# EAGLE board porta_stella (EAGLE 9.1.3)
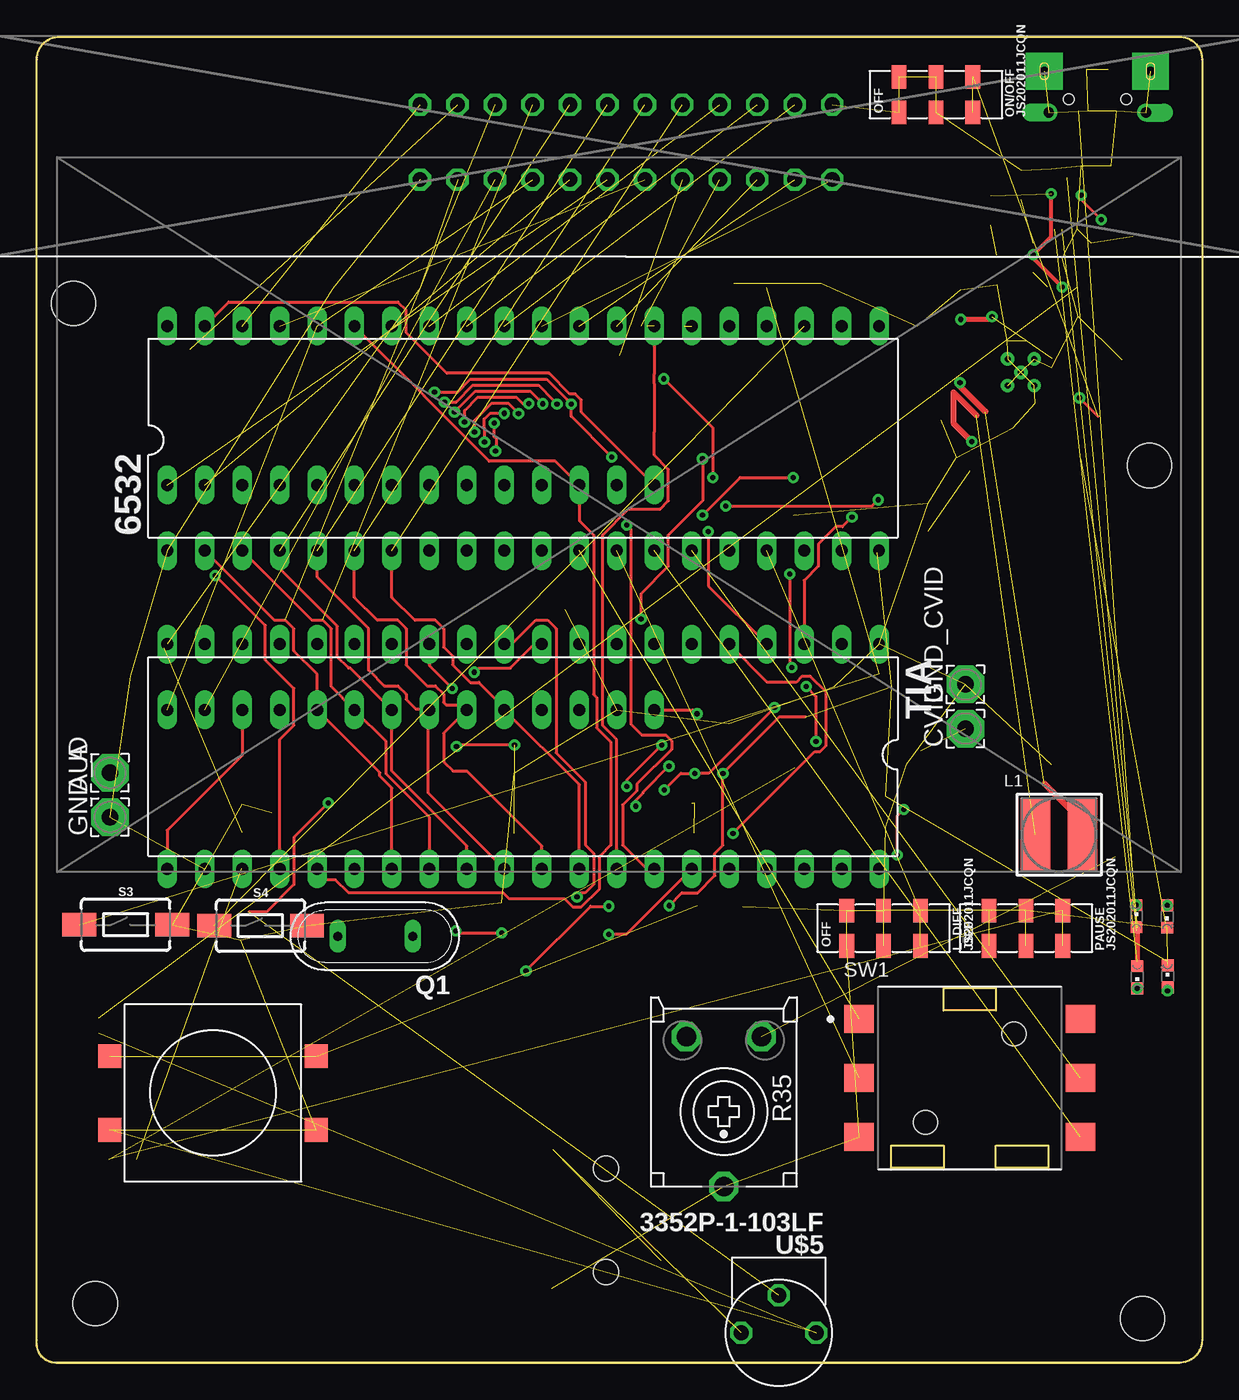
[diagram p0: board, top side]
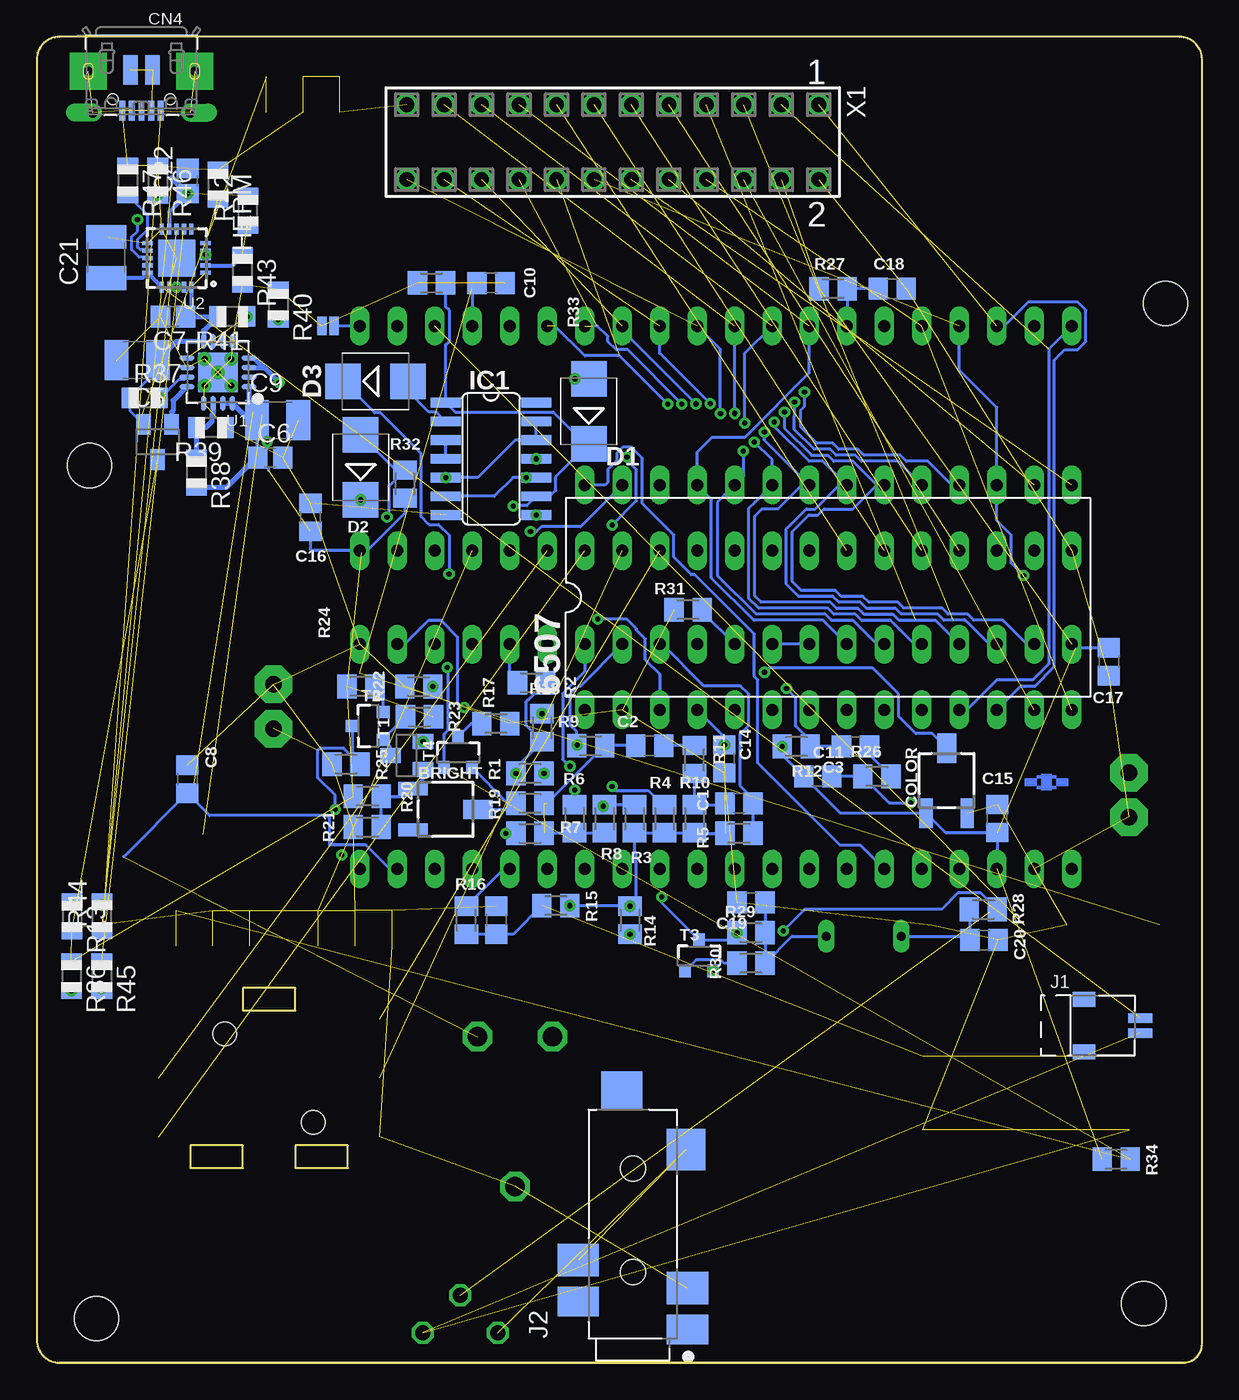
[diagram p1: board, bottom side, seen from below]

Size 78.99 x 89.92 mm. Coordinates in mm from the lower left corner, seen from the top.
Outline: 1.27,0 77.47,0
Outline: 1.27,0 arc-90 0,1.27 0,1.52 0,88.39 arc-90 1.52,89.92 77.47,89.92 arc-90 78.99,88.39 78.99,1.52 arc-90 77.47,0
Outline: 77.47,0 1.27,0
Outline: 57.91,13.21 57.91,14.73 61.47,14.73 61.47,13.21 57.91,13.21
Outline: 65.02,13.21 65.02,14.73 68.58,14.73 68.58,13.21 65.02,13.21
Outline: 61.47,23.88 61.47,25.4 65.02,25.4 65.02,23.88 61.47,23.88
Copper layers (1*16): Top 0.035mm / dielectric 1.5mm / Bottom 0.035mm
Design rules "default *": minimum track width 8mil, minimum drill 0.35mm, track to track 8mil, track to pad 8mil, pad to pad 8mil, via to via 8mil, smd to smd 0mil, copper to edge 40mil, drill to drill 8mil, minimum pad ring 10mil, minimum via ring 8mil, stop-mask expansion 4mil, vias tented up to drill 0mil, thermal gap 10mil
Holes 3 mm at 3.95,4 75.43,60.84 74.95,3 2.48,71.84

## Footprints (pad centres in the part's own frame; a part is rotated, then mirrored left to right if it is on the bottom)
DIL28 = drill 0.813 long: 1 -16.51,-7.62; 2 -13.97,-7.62; 3 -11.43,-7.62; 4 -8.89,-7.62; 5 -6.35,-7.62; 6 -3.81,-7.62; 7 -1.27,-7.62; 8 1.27,-7.62; 9 3.81,-7.62; 10 6.35,-7.62; 11 8.89,-7.62; 12 11.43,-7.62; 13 13.97,-7.62; 14 16.51,-7.62; 15 16.51,7.62; 16 13.97,7.62; 17 11.43,7.62; 18 8.89,7.62; 19 6.35,7.62; 20 3.81,7.62; 21 1.27,7.62; 22 -1.27,7.62; 23 -3.81,7.62; 24 -6.35,7.62; 25 -8.89,7.62; 26 -11.43,7.62; 27 -13.97,7.62; 28 -16.51,7.62
DIL40 = drill 0.813 long: 1 -24.13,-7.62; 2 -21.59,-7.62; 3 -19.05,-7.62; 4 -16.51,-7.62; 5 -13.97,-7.62; 6 -11.43,-7.62; 7 -8.89,-7.62; 8 -6.35,-7.62; 9 -3.81,-7.62; 10 -1.27,-7.62; 11 1.27,-7.62; 12 3.81,-7.62; 13 6.35,-7.62; 14 8.89,-7.62; 15 11.43,-7.62; 16 13.97,-7.62; 17 16.51,-7.62; 18 19.05,-7.62; 19 21.59,-7.62; 20 24.13,-7.62; 21 24.13,7.62; 22 21.59,7.62; 23 19.05,7.62; 24 16.51,7.62; 25 13.97,7.62; 26 11.43,7.62; 27 8.89,7.62; 28 6.35,7.62; 29 3.81,7.62; 30 1.27,7.62; 31 -1.27,7.62; 32 -3.81,7.62; 33 -6.35,7.62; 34 -8.89,7.62; 35 -11.43,7.62; 36 -13.97,7.62; 37 -16.51,7.62; 38 -19.05,7.62; 39 -21.59,7.62; 40 -24.13,7.62
2,54/1,1 = drill 1.118 pad 2.54 octagon: 1 0,0
3223G = smd 2 x 0.9: 1 -2.2,1.4; 3 -2.2,-1.4 | smd 2 x 1.3: 2 2.2,0
C0805 = smd 1.3 x 1.5: 1 -0.95,0; 2 0.95,0
C1210 = smd 1.6 x 2.7: 1 -1.4,0; 2 1.4,0
C0805' = smd 1.3 x 1.5: 1 -0.85,0; 2 0.85,0
ADAFRUIT_CHIPLED_0603 = smd 0.8 x 0.8: A 0,-0.75; C 0,0.75
4UCONN_20329 = smd 1 x 2: BASE@1 -0.75,-2; BASE@2 0.75,-2 | smd 0.4 x 1.35: D+ 0,0.775; D- -0.65,0.775; GND 1.3,0.775; ID 0.65,0.775; VBUS -1.3,0.775 | drill 0.7 offset: SPRT@1 -3.3,0.9; SPRT@2 3.3,0.9 | drill 0.6 pad 2.5 square: SPRT@3 -3.6,-1.9; SPRT@4 3.6,-1.9 | hole 0.7: -1.95,0; 1.95,0
DIODE_SMB = smd 2.4 x 2.4: A 2.2,0; C -2.2,0
SO14 = smd 0.66 x 2.032: 1 -3.81,-3.073; 2 -2.54,-3.073; 3 -1.27,-3.073; 4 0,-3.073; 5 1.27,-3.073; 6 2.54,-3.073; 7 3.81,-3.073; 8 3.81,3.073; 9 2.54,3.073; 10 1.27,3.073; 11 0,3.073; 12 -1.27,3.073; 13 -2.54,3.073; 14 -3.81,3.073
HW2-SMD-1.0-90D = smd 1.524 x 1.016: 3 -3.429,1.778; 4 -3.429,-1.778 | smd 1.651 x 0.635: + 0.381,0.508; - 0.381,-0.508
CUI_SJ-43516-SMT = smd 2 x 2.8: 1 -7.15,-3.7; 6 -5.25,3.7 | smd 2.8 x 2.6: 2 5.05,-3.6 | smd 2.2 x 2.8: 3 -2.45,3.7; 4 -4.35,-3.7 | smd 2.6 x 2.8: 5 9.05,0.75 | hole 1.7: -3.25,0; 3.75,0
SMT-JUMPER_2_NO_NO-SILK = smd 0.635 x 1.27: 1 -0.406,0; 2 0.406,0
INDUCTOR_5X5MM_TDK_VLC5045 = smd 2 x 5: P$1 -1.6,0; P$2 1.6,0
JS202011JCQN = smd 1 x 1.6: P$1 -2.5,1.2; P$2 0,1.2; P$3 2.5,1.2; P$4 -2.5,-1.2; P$5 0,-1.2; P$6 2.5,-1.2
QS = drill 0.61 long: 1 -2.54,0; 2 2.54,0
M0805 = smd 1.3 x 1.6: 1 -0.95,0; 2 0.95,0
R0805 = smd 1.1 x 1.4: 1 -1,0; 2 1,0
ECP10S = drill 1.321 octagon: A -2.54,-5.08; E 2.54,-5.08; S 0,5.08
TACTILE_SWITCH_SMD_6.0X3.5MM = smd 2.3 x 1.6: 1 -3.15,0; 2 3.15,0
E-SWITCH_JS5208_0 = smd 2 x 1.9: 1 -7.5,4; 2 -7.5,0; 3 -7.5,-4; 4 7.5,4; 5 7.5,0; 6 7.5,-4 | hole 1.6: 3,3; -3,-3
SOT23-BEC = smd 1 x 1.4: B -0.95,-1.1; C 0,1.1; E 0.95,-1.1
SOT23-3 = smd 0.8 x 0.9: 1 -0.95,-1; 2 0.95,-1; 3 0,1.1
TRANSISTOR_SC59-BEC = smd 1 x 1.4: B -0.95,-1.2; C 0,1.2; E 0.95,-1.2
PVQFN-16 = smd 1.05 x 0.35: 1 -2.1,0.975; 2 -2.1,0.325; 3 -2.1,-0.325; 4 -2.1,-0.975; 9 2.1,-0.975; 10 2.1,-0.325; 11 2.1,0.325; 12 2.1,0.975 | smd 0.35 x 1.05: 5 -0.975,-2.1; 6 -0.325,-2.1; 7 0.325,-2.1; 8 0.975,-2.1; 13 0.975,2.1; 14 0.325,2.1; 15 -0.325,2.1; 16 -0.975,2.1 | drill 0.4: P$18 0,0; P$19 -0.9,0.9; P$20 0.9,0.9; P$21 0.9,-0.9; P$22 -0.9,-0.9 | smd 2.7 x 2.7: THERMAL 0,0
QFN20_4MM = smd 0.73 x 0.28: P$1 -1.965,1; P$2 -1.965,0.5; P$3 -1.965,0; P$4 -1.965,-0.5; P$5 -1.965,-1; P$11 1.965,-1; P$12 1.965,-0.5; P$13 1.965,0; P$14 1.965,0.5; P$15 1.965,1 | smd 0.28 x 0.73: P$6 -1,-1.965; P$7 -0.5,-1.965; P$8 0,-1.965; P$9 0.5,-1.965; P$10 1,-1.965; P$16 1,1.965; P$17 0.5,1.965; P$18 0,1.965; P$19 -0.5,1.965; P$20 -1,1.965 | smd 2.5 x 2.5: P$21 0,0
3352P-1-103LF = drill 1 octagon: P$1 2.54,2.54; P$2 -2.54,2.54; P$3 0,0
TL3300DF260Q = smd 1.55 x 1.6: P$1 -7,2.5; P$2 7,2.5; P$3 -7,-2.5; P$4 7,-2.5
SSW-112-02-G-Q = drill 1 pad 1.5 octagon: 1 -13.97,-2.54; 2 -13.97,2.54; 3 -11.43,-2.54; 4 -11.43,2.54; 5 -8.89,-2.54; 6 -8.89,2.54; 7 -6.35,-2.54; 8 -6.35,2.54; 9 -3.81,-2.54; 10 -3.81,2.54; 11 -1.27,-2.54; 12 -1.27,2.54; 13 1.27,-2.54; 14 1.27,2.54; 15 3.81,-2.54; 16 3.81,2.54; 17 6.35,-2.54; 18 6.35,2.54; 19 8.89,-2.54; 20 8.89,2.54; 21 11.43,-2.54; 22 11.43,2.54; 23 13.97,-2.54; 24 13.97,2.54

## Placement (x,y rotation side)
6507  MOS_6507  [DIL28]  25.34,51.9 0 bottom
6532  MOS_6532  [DIL40]  32.96,62.69 0 top
AUD  AUD  [2,54/1,1]  4.95,40 90 top
BRIGHT  500k  [3223G]  51.28,37.52 0 bottom
C1  47pF  [C0805]  31.39,37.93 180 bottom
C2  22pF  [C0805]  37.43,41.84 180 bottom
C3  100nF  [C0805]  23.49,41.79 0 bottom
C4  470pF  [C0805]  47.84,30 90 bottom
C5  10uF  [C1210]  72.18,67.99 180 bottom
C6  2.2uF  [C0805']  63.17,61.38 0 bottom
C7  0.1uF  [C0805']  69.77,70.95 180 bottom
C8  68nF  [C0805]  68.79,39.57 90 bottom
C9  10uF  [C1210]  62.67,63.91 0 bottom
C10  10nF  [C0805]  48.2,73.22 0 bottom
C11  100nF  [C0805]  26.05,39.76 180 bottom
C14  100nF  [C0805]  32.38,40.95 270 bottom
C15  100nF  [C0805]  13.89,36.91 90 bottom
C16  100nF  [C0805]  60.45,57.33 90 bottom
C17  100nF  [C0805]  6.32,47.53 270 bottom
C18  100nF  [C0805]  21,72.83 0 bottom
C19  47Pf  [C0805]  30.58,31.21 180 bottom
C20  47Pf  [C0805]  14.78,28.66 0 bottom
C21  10uF  [C1210]  74.29,74.95 90 bottom
C22  10uf  [C0805']  68.77,80.14 90 bottom
CHRG/LBO  ORANGE  [ADAFRUIT_CHIPLED_0603]  74.55,30.28 0 top
CN4  MicroUSB  [4UCONN_20329]  71.9,85.69 180 bottom
COLOR  500k  [3223G]  17.32,39.48 90 bottom
CVID  CVID  [2,54/1,1]  62.95,43 90 top
D1  [DIODE_SMB]  41.57,64.52 90 bottom
D2  [DIODE_SMB]  57.04,60.71 90 bottom
D3  [DIODE_SMB]  56.03,66.55 0 bottom
DONE  GREEN  [ADAFRUIT_CHIPLED_0603]  74.6,26.13 180 top
GND_A  GND_A  [2,54/1,1]  4.95,37 90 top
GND_CVID  GND_CVID  [2,54/1,1]  62.95,46 90 top
IC1  74LS00D  [SO14]  48.2,61.3 270 bottom
J1  2p-smd-1.0-90d  [HW2-SMD-1.0-90D]  4.57,22.86 0 bottom
J2  SJ-43516-SMT  [CUI_SJ-43516-SMT]  38.59,9.4 90 bottom
JP1  COLOR/BW  [SMT-JUMPER_2_NO_NO-SILK]  59.26,70.31 180 bottom
L1  6.8uH  [INDUCTOR_5X5MM_TDK_VLC5045]  69.3,35.81 0 top
L_DIFF  JS202011JCQN  [JS202011JCQN]  57.4,29.46 0 top
LBO  RED  [ADAFRUIT_CHIPLED_0603]  76.63,30.25 180 top
ON  BLUE  [ADAFRUIT_CHIPLED_0603]  76.66,26.19 0 top
ON/OFF  JS202011JCQN  [JS202011JCQN]  60.95,86 0 top
PAUSE  JS202011JCQN  [JS202011JCQN]  67.06,29.46 0 top
Q1  [QS]  22.93,28.91 180 top
R1  3.3k  [M0805]  45.56,39.96 0 bottom
R2  3.3k  [M0805]  45.46,46.11 180 bottom
R3  3.3k  [M0805]  38.48,36.89 90 bottom
R4  3.3k  [M0805]  36.44,36.89 90 bottom
R5  1k  [M0805]  31.39,35.9 0 bottom
R6  27k  [M0805]  42.54,36.89 90 bottom
R7  56k  [M0805]  45.56,35.9 180 bottom
R8  27k  [M0805]  40.51,36.89 90 bottom
R9  110k  [M0805]  41.45,41.84 180 bottom
R10  1k  [M0805]  34.41,36.89 90 bottom
R11  6.8k  [M0805]  34.41,40.9 270 bottom
R12  1k  [M0805]  27.5,41.79 0 bottom
R13  1K  [R0805]  76.62,30.26 270 bottom
R14  10k  [M0805]  38.78,30 90 bottom
R15  10k  [M0805]  43.81,30.99 0 bottom
R16  220  [M0805]  49.88,30 270 bottom
R17  1k  [M0805]  47.87,43.34 0 bottom
R18  24k  [M0805]  44.75,43.06 90 bottom
R19  1k  [M0805]  45.56,37.93 0 bottom
R20  3.3k  [M0805]  56.59,38.41 0 bottom
R21  1k  [M0805]  56.59,36.33 180 bottom
R22  68  [M0805]  53.11,45.85 180 bottom
R23  150  [M0805]  53.06,43.8 180 bottom
R24  18  [M0805]  57.02,45.85 0 bottom
R25  75  [M0805]  58.03,40.6 180 bottom
R26  18k  [M0805]  22.04,39.76 0 bottom
R27  24k  [M0805]  25.01,72.83 0 bottom
R28  15K  [M0805]  14.83,30.74 180 bottom
R29  150K  [M0805]  30.58,29.15 0 bottom
R30  390  [M0805]  30.58,27.09 0 bottom
R31  1K  [M0805]  34.84,51.06 0 bottom
R32  1.5k  [M0805]  54.05,59.59 90 bottom
R33  1k  [M0805]  52.24,73.23 180 bottom
R34  1k  [M0805]  5.82,13.79 0 bottom
R35  [ECP10S]  46.57,17.03 180 top
R36  1K  [R0805]  76.65,26.2 270 bottom
R37  200K  [R0805]  71.68,65.44 0 bottom
R38  1.87M  [R0805]  68.18,60.37 270 bottom
R39  200K  [R0805]  67.19,63.42 180 bottom
R40  340K  [R0805]  62.63,71.76 270 bottom
R41  1.87M  [R0805]  65.75,70.95 180 bottom
R42  270K  [R0805]  64.68,78.13 90 bottom
R43  100K  [R0805]  65.06,74.11 270 bottom
R44  1K  [R0805]  74.58,30.28 90 bottom
R45  1K  [R0805]  74.59,26.21 270 bottom
R46  1.0K  [R0805]  70.8,80.17 270 bottom
R47  100K  [R0805]  72.84,80.17 270 bottom
S3  START  [TACTILE_SWITCH_SMD_6.0X3.5MM]  6.02,29.7 0 top
S4  SELECT  [TACTILE_SWITCH_SMD_6.0X3.5MM]  15.16,29.64 0 top
SW1  E-SWITCH_JS5208E-SWITCH_JS5208_0_0  [E-SWITCH_JS5208_0]  63.25,19.3 0 top
T1  2N3904  [SOT23-BEC]  53.92,41.18 90 bottom
T2  PN3906  [SOT23-3]  56.51,43.19 90 bottom
T3  PN3906  [SOT23-3]  34.11,27.57 0 bottom
T4  PN3906  [SOT23-3]  50.44,41.36 0 bottom
T5  MMUN2133LT1G  [TRANSISTOR_SC59-BEC]  70.81,62.45 180 bottom
THERM  15K  [R0805]  66.73,79.88 270 bottom
TIA  ATARI_TIA  [DIL40]  32.96,41.1 180 top
U1  TPS61090RSAR  [PVQFN-16]  66.72,67.16 180 bottom
U2  MCP73871  [QFN20_4MM]  69.52,74.91 180 bottom
U$5  3352P-1-103LF  [3352P-1-103LF]  50.29,4.57 180 top
U$7  TL3300DF260Q  [TL3300DF260Q]  11.94,18.29 0 top
X1  SSW-112-02-G-Q  [SSW-112-02-G-Q]  39.95,82.78 180 bottom

## Library data of the parts
6507 6532 L_DIFF ON/OFF PAUSE TIA U$5 U$7 = tiny_stella
AUD CVID GND_A GND_CVID = wirepad
BRIGHT COLOR R35 = pot
C1-C5 C8-C11 C14-C21 R1-R12 R14-R34 = resistor
C6 C7 C22 R13 R36-R47 THERM = adafruit
CHRG/LBO DONE LBO ON T5 = piboy_new
CN4 L1 U1 U2 = microbuilder
D1-D3 = eagle-ltspice; SPICEMODEL: diode; SPICEPREFIX: D
IC1 = 74xx-us
J1 = Seeed-Connector
J2 = tiny_stella; MANUFACTURER: CUI INC; PART_REV: 1.02; STANDARD: MANUFACTURER RECOMMENDATIONS
JP1 = SparkFun-Jumpers
Q1 = special
S3 S4 = SparkFun-Switches; PROD_ID: SWCH-00815; SF_SKU: COM-08229
SW1 = tiny_stella; CENTROID_NOT_SPECIFIED: No; DATASHEET: https://www.e-switch.com/system/asset/product_line/data_sheet/23/JS5208.pdf; DIGIKEY_DESCRIPTION: SWITCH NAVIGATION 20MA 15V; DIGIKEY_PART_NUMBER: EG4561-ND; LEAD_FREE: yes; MF: E-Switch; MFG_PACKAGE_IDENT: http://spec_sheets.e-switch.com/specs/P200020.pdf; MOUSER_PART_NUMBER: 612-JS5208; MPN: JS5208; PACKAGE: SW_PTH_12MM4_12MM4; PREFIX: SW; ROHS: yes; TEMPERATURE_RANGE_HIGH: +70°C; TEMPERATURE_RANGE_LOW: -20°C
T1 = transistor
T2-T4 = User-Submitted; PROD_ID: TRANS-08052
X1 = con-samtec; MF: Samtec Inc.; MPN: SSW-112-02-G-Q

## Nets
+5V: 6507.4 6532.20 C6.1 C9.1 C11.2 C14.1 C15.1 C16.1 C17.1 COLOR.1 R1.1 R2.1 R3.1 R4.1 R5.1 R10.1 R12.1 R14.2 R15.2 R18.1 R20.1 R23.1 R24.1 R27.1 R32.1 R34.1 R36.1 R38.2 T3.2 TIA.20 TIA.23 U1.1 U1.15 U1.16 X1.4
A0: 6507.5 6532.7 TIA.32 X1.15
A1: 6507.6 6532.6 TIA.31 X1.13
A2: 6507.7 6532.5 TIA.30 X1.11
A3: 6507.8 6532.4 TIA.29 X1.9
A4: 6507.9 6532.3 TIA.28 X1.7
A5: 6507.10 6532.2 TIA.27 X1.5
A6: 6507.11 6532.40 X1.3
A7: 6507.12 6532.38 TIA.21 X1.1
A8: 6507.13 X1.6
A9: 6507.14 6532.36 X1.8
A10: 6507.15 X1.12
A11: 6507.16 X1.10
A12: 6507.17 6532.37 TIA.24 X1.14
AUD: J2.2 J2.3 U$5.P$1
BOOST_ENABLE: ON/OFF.P$3 ON/OFF.P$6 R37.2 U1.11
CPU_RDY: 6507.3 IC1.11
CVID: J2.1
D1: 6507.25 6532.33 TIA.14 X1.17
D2: 6507.24 6532.32 TIA.15 X1.19
D3: 6507.23 6532.31 TIA.16 X1.21
D4: 6507.22 6532.30 TIA.17 X1.24
D5: 6507.21 6532.29 TIA.18 X1.22
D6: 6507.20 6532.28 TIA.19 X1.20
D7: 6507.19 6532.27 TIA.33 X1.18
D8: 6507.18 6532.26 TIA.34 X1.16
GND: 6507.2 6532.1 C4.2 C5.2 C6.2 C7.2 C8.2 C9.2 C10.2 C14.2 C15.2 C16.2 C17.2 C18.2 C19.2 C20.2 C21.2 C22.2 CN4.BASE@1 CN4.BASE@2 CN4.D+ CN4.D- CN4.GND CN4.ID CN4.SPRT@1 CN4.SPRT@2 CN4.SPRT@3 CN4.SPRT@4 COLOR.3 GND_A.1 GND_CVID.1 IC1.7 J1.- J2.4 JP1.2 L_DIFF.P$1 L_DIFF.P$2 L_DIFF.P$4 L_DIFF.P$5 LBO.C ON.C ON/OFF.P$1 ON/OFF.P$2 ON/OFF.P$4 ON/OFF.P$5 PAUSE.P$1 PAUSE.P$2 PAUSE.P$4 PAUSE.P$5 R17.2 R21.2 R22.2 R25.2 R31.1 R33.2 R35.S R39.1 R40.1 R43.2 R46.1 R47.1 S3.2 S4.2 SW1.3 THERM.1 TIA.1 TIA.22 U1.5 U1.6 U1.7 U1.10 U1.13 U1.P$18 U1.P$19 U1.P$20 U1.P$21 U1.P$22 U1.THERMAL U2.P$10 U2.P$11 U2.P$21 U$5.P$2 U$7.P$3 U$7.P$4 X1.2 X1.23
JACK_AUD_OUT_L: J2.5
JACK_AUD_OUT_R: J2.6
LBO: T5.B U1.12
LFT_FIRE: C4.1 R15.1 R16.2 U$7.P$1 U$7.P$2
LFT_JOY_DWN: 6532.13 SW1.2
LFT_JOY_LFT: 6532.14 SW1.6
LFT_JOY_RGT: 6532.15 SW1.5
LFT_JOY_UP: 6532.12 SW1.1
LFT_PADDLE_A: C8.1 R35.A TIA.39
LFT_PADDLE_B: TIA.40
N$1: R1.2 R6.2 TIA.2
N$2: R2.2 R7.2 TIA.5
N$3: R3.2 R8.2 TIA.7
N$4: R4.2 R9.2 TIA.8
N$5: C1.1 R5.2 TIA.9
N$6: C1.2 R10.2 R11.2
N$7: C2.1 R11.1
N$8: AUD.1
N$9: R14.1 TIA.35
N$10: L1.P$2 U1.3 U1.4
N$11: R16.1 TIA.36
N$12: R40.2 R41.1 U1.9
N$13: BRIGHT.2 R19.1 T4.2
N$14: BRIGHT.1 R20.2 R21.1 T1.B
N$15: R22.1 T1.E
N$16: R23.2 T1.C T2.1
N$17: COLOR.2 TIA.10
N$18: 6532.24 C10.1 S3.1
N$19: 6532.23 S4.1
N$20: 6532.21 JP1.1
N$21: 6532.17 L_DIFF.P$3 L_DIFF.P$6
N$22: LBO.A R13.1
N$23: 6507.1 R18.2
N$24: R24.2 T2.2
N$25: CVID.1 R25.1 T2.3
N$26: C3.2 R26.2
N$27: C3.1 R12.2 TIA.12 TIA.13
N$28: C11.1 R26.1 U$5.P$3
N$29: 6532.34 C18.1 R27.2
N$30: C20.1 Q1.2 R28.2
N$31: C19.1 Q1.1 R29.2 R30.2
N$32: R28.1 R29.1 R31.2 T3.3 TIA.11
N$33: R30.1 T3.1
N$34: R17.1 T4.3
N$35: IC1.5 IC1.8 IC1.12 IC1.13
N$36: D3.A IC1.2
N$37: R38.1 R39.2 U1.14
N$38: IC1.3 IC1.4
N$39: D1.A IC1.6 IC1.10
N$40: D1.C D2.C IC1.1 IC1.9 R33.1
N$41: R13.2 T5.C
N$42: ON.A R36.2
N$43: R42.1 R43.1 U2.P$2
N$44: R45.1 U2.P$7
N$45: R44.1 U2.P$8
N$46: R46.2 U2.P$13
N$47: THERM.2 U2.P$5
N$48: DONE.C R45.2
N$49: CHRG/LBO.C R44.2
N$50: R47.2 U2.P$12
N$56: SW1.4
P_SW: D3.C PAUSE.P$3 PAUSE.P$6 R34.2 T4.1
PHI_0: 6507.27 TIA.4
PHI_2: 6507.28 6532.39 TIA.26
R/W: 6507.26 6532.35 TIA.25
RAW_CVID: C2.2 R6.1 R7.1 R8.1 R9.1 R19.2
RGT_JOY_DWN: 6532.9
RGT_JOY_LFT: 6532.10
RGT_JOY_RGT: 6532.11
RGT_JOY_UP: 6532.8
RGT_PADDLE_A: TIA.37
RGT_PADDLE_B: TIA.38
TIA_RDY: D2.A R32.2 TIA.3
VBAT: C5.1 C7.1 L1.P$1 R37.1 R41.2 T5.E U1.8 U2.P$1 U2.P$20
VBUS: C22.1 CHRG/LBO.A CN4.VBUS DONE.A R42.2 U2.P$3 U2.P$4 U2.P$9 U2.P$17 U2.P$18 U2.P$19
VCC: IC1.14
VLIPO: C21.1 J1.+ U2.P$14 U2.P$15 U2.P$16

## Tracks (layer width: path | path; a pad name or v marks a point on that pad's centre or on a via)
+5V  (via drill 0.35)  (11 unrouted)
  Top 0.203: C14.1 28.57,41.9 R12.1 | T3.2 37.54,30.95 R14.2 | v42.87,30.99 43.73,31.86 44.79,31.86 45.97,33.03 45.97,34.54 46.51,35.09 R1.1 50.35,43.8 R23.1
  Bottom 0.203: TIA.23 13.89,33.51 C15.1 17.4,35.96 COLOR.1 24.53,37.28 C11.2 28.45,41.2 R12.1 | C14.1 32.38,42.42 6507.4 | R5.1 34.37,35.9 R10.1 R4.1 R3.1 38.48,34.67 38.35,34.54 38.35,31.39 R14.2 38.82,30.99 R15.2 v42.87,30.99 | R1.1 46.51,40.35 R18.1 44.75,42.13 45.85,43.23 45.85,44.79 45.68,44.96 45.65,44.96 R2.1 | 63.28,60.51 63.28,60.64 C6.1 64.07,61.43 64.07,63.8 C9.1 | R32.1 54.05,57.61 56.55,55.1 56.97,55.1 56.97,54.95 6532.20 60.4,55.07 60.45,55.12 C16.1 | C17.1 8.59,48.48 TIA.20
  Bottom 0.356: U1.1 64.62,64.46 C9.1 | 64.07,63.8 64.47,63.8 U1.16 U1.15 | R38.2 66.14,59.37 64.07,61.43
  other vias: 32.38,41.9 28.45,41.79 33.16,26.57 38.78,30.95 46.51,39.96
A0  (1 unrouted)
  Top 0.203: 6532.7 24.07,51.9 25.62,50.35 27.01,50.35 27.58,49.78 27.58,48.52 28.19,47.91 28.19,47.33 29.38,46.14 29.96,46.14 31.66,44.44 31.66,44.32 6507.5 36.77,39.2 TIA.32
A1  (1 unrouted)
  Top 0.203: TIA.31 34.23,35.03 29.15,40.11 28.21,40.11 27.58,40.75 27.58,42.7 6507.6 28.82,44.61 27.76,44.61 27.58,44.79 27.58,45.34 27.01,45.9 26.46,45.9 25.04,47.33 25.04,49.78 24.47,50.35 23.08,50.35 21.53,51.9 6532.6
A2  (1 unrouted)
  Top 0.203: 6507.7 26.55,44.34 | TIA.30 26.55,38.63 26.55,44.34 | 26.55,44.34 25.69,44.34 25.04,44.99 25.04,45.34 24.47,45.9 23.57,45.9 22.5,46.97 22.5,49.78 18.99,53.29 6532.5
A3  (1 unrouted)
  Top 0.203: TIA.29 29.15,35.03 24.07,40.11 6507.8 21.25,47.1 21.13,47.1 20.36,47.87 20.36,49.95 18.17,52.15 18.03,52.28 16.45,53.86 6532.4
A4  (1 unrouted)
  Top 0.203: TIA.28 26.61,37 23.67,39.95 23.67,42.15 6507.9 19.96,45.85 19.96,49.78 19.39,50.35 18.64,50.35 6532.3
A5  (1 unrouted)
  Top 0.203: TIA.27 24.07,38.96 23.26,39.78 23.26,40.01 6507.10 18.99,46.7 17.42,48.27 17.42,49.78 16.85,50.35 16.1,50.35 6532.2
A6  (1 unrouted)
  Bottom 0.203: 6532.40 10.41,68.74 10.41,47.39 11.49,46.31 13.91,46.31 15.94,44.28 6507.11
A7  (1 unrouted)
  Top 0.203: 6507.12 13.91,41.18 8.83,36.1 TIA.21
  Bottom 0.203: 6532.38 13.4,70.31 11.77,71.94 8.43,71.94 7.87,71.37 7.87,69.25 8.43,68.69 9.29,68.69 10,67.98 10,47.23 11.32,45.9 12.29,45.9 6507.12
A8  (1 unrouted)
A9  (2 unrouted)
A10  (1 unrouted)
A11  (1 unrouted)
A12  (via drill 0.35)  (1 unrouted)
  Top 0.203: TIA.24 16.45,42.25 17.42,43.22 17.42,45.73 15.49,47.66 15.49,49.99 v12.1,53.38
  Bottom 0.203: 12.14,53.42 v12.1,53.38 12.95,54.23 12.95,56.13 13.91,57.1 6507.17 13.91,64.78 16.45,67.32 6532.37
AUD  (2 unrouted)
BOOST_ENABLE  (via drill 0.35)  (2 unrouted)
  Top 0.203: 71.93,64.19 R37.2
  Bottom 0.203: U1.11 68.98,66.67 69.36,66.67 70.6,65.44 R37.2
  other vias: 70.68,65.44
CPU_RDY  (via drill 0.35)
  Top 0.203: IC1.11 45.13,58.45 42.82,56.14 42.82,54.01 40.96,52.16 v40.96,50.42
  Bottom 0.203: 6507.3 36.77,46.7 37.74,47.66 37.74,49.08 38.35,49.69 38.35,49.78 38.99,50.42 v40.96,50.42
  other vias: 45.13,61.3
D1  (1 unrouted)
  Bottom 0.203: TIA.14 25.7,50.35 30.39,50.35 33.27,53.23 33.27,58.55 6507.25 34.23,61.75 33.22,62.77 30.98,62.77 26.61,67.14 6532.33
D2  (via drill 0.35)  (1 unrouted)
  Top 0.203: v31.01,63.71 31.01,63.02 31.01,62.8 31.15,62.66 31.15,61.88 v31.1,61.83
  Bottom 0.203: TIA.15 22.05,48.72 23.67,50.35 25.12,50.35 25.53,50.76 30.22,50.76 32.86,53.4 32.86,58.35 6507.24 31.1,60.12 v31.1,61.83 | v31.01,63.71 31.01,68.46 6532.32
D3  (via drill 0.35)  (1 unrouted)
  Top 0.203: v31.69,64.38 31.3,64.38 31.29,64.39 30.73,64.39 30.32,63.99 30.32,63.43 30.35,63.4 v30.35,62.44
  Bottom 0.203: TIA.16 19.51,48.72 21.13,50.35 23.1,50.35 23.51,50.76 24.96,50.76 25.36,51.16 30.05,51.16 30.73,51.84 30.73,57.94 30.3,58.38 29.25,59.42 6507.23 29.15,61.24 v30.35,62.44 | v31.69,64.38 6532.31
D4  (via drill 0.35)  (1 unrouted)
  Top 0.203: v32.65,64.37 32.37,64.65 32.37,64.67 31.97,65.07 30.82,65.07 29.68,63.92 29.68,63.51 29.67,63.5 v29.67,63.11
  Bottom 0.203: TIA.17 18.08,50.35 20.56,50.35 20.97,50.76 22.93,50.76 23.34,51.16 24.79,51.16 25.19,51.57 29.88,51.57 30.32,52.01 30.32,57.41 29.84,57.89 28.75,57.89 27.13,59.52 6507.22 29.67,62.57 v29.67,63.11 | v32.65,64.37 32.65,68.73 6532.30
D5  (via drill 0.35)  (1 unrouted)
  Top 0.203: v33.35,65.03 32.95,65.03 32.51,65.47 29.88,65.47 28.99,64.58 v28.99,63.79
  Bottom 0.203: v33.35,65.03 36.77,68.46 6532.29 | TIA.18 14.43,48.72 16.05,50.35 17.5,50.35 17.91,50.76 20.39,50.76 20.8,51.16 22.76,51.16 23.17,51.57 24.62,51.57 25.03,51.98 27.35,51.98 28.19,52.81 28.19,56.52 26.82,57.89 26.21,57.89 24.59,59.52 6507.21 25.7,61.14 26.64,61.14 28.99,63.5 v28.99,63.79
D6  (via drill 0.35)  (1 unrouted)
  Top 0.203: v34.31,65.03 34.03,65.3 34.03,65.31 33.46,65.88 29.71,65.88 v28.31,64.48
  Bottom 0.203: 22.05,59.52 23.67,57.89 25.64,57.89 26.05,57.49 26.65,57.49 27.78,56.35 27.78,52.98 27.18,52.38 24.86,52.38 24.45,51.98 23,51.98 22.59,51.57 20.63,51.57 20.22,51.16 17.62,51.16 17.22,50.76 15.89,50.76 15.48,50.35 13.51,50.35 11.89,48.72 TIA.19 | 6507.20 22.05,59.52 | 22.05,59.52 23.67,61.14 24.98,61.14 25.38,61.55 26.47,61.55 28.31,63.39 28.31,64.08 28.37,64.14 28.37,64.42 v28.31,64.48 | v34.31,65.03 39.31,70.03 6532.28
D7  (via drill 0.35)  (2 unrouted)
  Top 0.203: v35.27,65.02 34.99,65.3 34.99,65.31 34.01,66.29 29.55,66.29 28.42,65.16 28.03,65.16 28.02,65.16 v27.63,65.16 | TIA.33 39.31,42.25 38.35,43.22 38.35,56.13 40.11,57.89 42.25,57.89 42.82,58.46 42.82,60.58 41.83,61.57 41.83,63.08 41.85,63.1 41.85,66.41 41.83,66.44 41.83,67 41.85,67.03 6532.27
  Bottom 0.203: v35.27,65.02 38.93,68.69 39.71,68.69 40.28,69.25 40.28,69.6 40.99,70.31 41.34,70.31 | v27.63,65.16 27.63,64.76 27.63,64.19 27.63,63.29 26.3,61.96 25.22,61.96 24.81,61.55 23.51,61.55 23.1,61.14 20.62,61.14 6507.19
D8  (via drill 0.35)  (2 unrouted)
  Top 0.203: v39.99,56.81 40.28,56.52 40.28,43.31 41.03,42.57 42.64,42.57 43.04,42.17 43.04,41.6 40.68,39.24 40.68,38.79 39.72,37.83 39.72,35.1 41.34,33.48 TIA.34 | v38.99,61.42 36.23,64.18 v36.23,65.01 35.95,65.29 35.95,65.3 34.56,66.69 29.38,66.69 28.52,65.84 27.35,65.84 27.34,65.83 v26.95,65.83
  Bottom 0.203: v36.23,65.01 39.49,68.28 41.85,68.28 43.88,70.31 | v38.99,61.42 38.99,61.22 38.35,60.58 38.35,58.45 v39.99,56.81 | v26.95,65.83 26.95,65.44 26.95,64.87 27.22,64.6 27.22,63.45 26.13,62.36 25.05,62.36 24.64,61.96 23.34,61.96 22.93,61.55 20.45,61.55 20.05,61.14 18.59,61.14 16.97,59.52 6507.18
GND  (84 unrouted)
LBO
  Bottom 0.356: U1.12 69.75,65.25 69.75,64.58 69.86,64.47 T5.B
LFT_FIRE  (2 unrouted)
  Bottom 0.203: R15.1 46.7,29.05 C4.1 R16.2
LFT_JOY_DWN  (1 unrouted)
LFT_JOY_LFT  (1 unrouted)
LFT_JOY_RGT  (1 unrouted)
LFT_JOY_UP  (1 unrouted)
LFT_PADDLE_A  (1 unrouted)
  Bottom 0.203: TIA.39 55.07,33.48 56.69,35.11 59.15,35.11 59.15,36.93 59.33,37.1 67.28,37.1 C8.1 73.11,34.3
N$1  (via drill 0.35)
  Top 0.203: v42.54,38.84 43.66,39.96 R1.2 45.55,39.96 v50.01,44.42
  Bottom 0.203: R6.2 v42.54,38.83 v42.54,38.84 | v50.01,44.42 50.26,44.42 50.49,44.66 50.49,49.23 51.61,50.35 52.41,50.35 54.04,48.72 TIA.2
  other vias: 44.61,39.96
N$2  (via drill 0.35)
  Top 0.203: v47.2,35.9 52.74,41.45 53.1,41.45 53.5,41.85 53.5,45.47 52.44,46.54 51.87,46.54 51.47,46.14 49.52,46.14 TIA.5
  Bottom 0.203: R2.2 46.93,46.63 TIA.5 | R7.2 v47.2,35.9
N$3  (via drill 0.35)
  Top 0.203: v42.85,40.45 41.09,38.68 41.09,38.62 40.6,38.13 v40.6,37.74
  Bottom 0.203: R3.2 40.41,37.84 | 40.41,37.84 R8.2 | v42.85,40.45 43.14,40.73 43.17,40.73 43.35,40.91 43.35,45.38 41.85,46.88 TIA.7 | v40.6,37.74 40.5,37.74 40.41,37.84
N$4  (via drill 0.35)
  Top 0.203: v42.35,41.88 40,39.53 v40,39.07
  Bottom 0.203: TIA.8 42.13,45.9 42.25,45.9 42.82,45.34 42.82,43.22 42.4,42.8 R9.2 v42.35,41.88 | v40,39.07 39.72,38.79 37.55,38.79 36.59,37.84 R4.2
N$5
  Bottom 0.203: TIA.9 36.6,48.72 33.78,45.9 31.29,45.9 30.73,45.34 30.73,43.22 31.29,42.65 31.32,42.65 31.32,39.15 30.44,38.26 C1.1 R5.2
N$6
  Bottom 0.203: R11.2 R10.2 32.43,37.84 C1.2
N$7
  Bottom 0.203: R11.1 C2.1
N$9  (via drill 0.35)
  Top 0.203: TIA.35 39.96,29.05 R14.1
  other vias: 38.78,29.05
N$10  (via drill 0.35)  (1 unrouted)
  Top 0.406: v62.58,66.48 62.58,66.23 64.31,64.5 | 68.31,39.27 70.9,36.68 L1.P$2
  Bottom 0.356: U1.3 63.59,67.49 | 63.59,67.49 v62.58,66.48 | U1.4 64.24,68.14 63.59,67.49
N$11
  Bottom 0.203: R16.1 47.35,33.48 TIA.36
N$12  (via drill 0.35)  (1 unrouted)
  Top 0.356: R40.2 64.56,70.76 R41.1
  other vias: 62.63,70.76 64.75,70.95
N$13
  Bottom 0.203: BRIGHT.2 46.92,37.52 R19.1 47.06,37.93 T4.2
N$14
  Bottom 0.203: R21.1 R20.2 53.99,38.41 BRIGHT.1 52.82,39.58 T1.B
N$15  (via drill 0.35)
  Top 0.203: R22.1 52.82,45.19 T1.E
  other vias: 52.16,45.85 52.82,42.13
N$16
  Bottom 0.203: T1.C 55.02,41.75 T2.1 55.51,42.29 R23.2
N$17  (via drill 0.35)
  Top 0.203: v29.66,46.82 29.94,47.1 32.09,47.1 33.72,48.72 TIA.10
  Bottom 0.203: COLOR.2 18.29,42.65 19.39,42.65 20.57,43.83 20.57,45.34 22.33,47.1 29.39,47.1 v29.66,46.82
N$18  (2 unrouted)
  Bottom 0.203: C10.1 49.47,72.9 6532.24
N$19  (1 unrouted)
N$20
  Bottom 0.203: 6532.21 JP1.1
N$21  (2 unrouted)
N$22  (via drill 0.35)
  Bottom 0.356: R13.1 LBO.A
  other vias: 76.63,31
N$23  (via drill 0.35)
  Top 0.203: 6507.1 44.48,44.28 R18.2
  other vias: 44.75,44.01
N$24
  Bottom 0.203: T2.2 55.51,45.3 R24.2
N$25  (via drill 0.35)  (1 unrouted)
  Top 0.203: v58.34,34.43 58.34,37.08 v58.77,37.51
  Bottom 0.203: T2.3 57.61,41.12 R25.1 57.1,40.6 58.21,41.7 59.76,41.7 59.94,41.52 59.94,39.67 58.77,38.5 v58.77,37.51
N$26
  Bottom 0.203: C3.2 22.54,41.2 R26.2
N$27  (via drill 0.35)
  Top 0.203: TIA.13 26.61,47.27 v28.17,45.71
  Bottom 0.203: C3.1 R12.2 26.55,42.19 27.58,43.22 27.58,45.12 v28.17,45.71 | TIA.13 TIA.12
N$28  (via drill 0.35)  (1 unrouted)
  Top 0.203: v19.75,37.96 17.42,35.63 17.42,32.42 15.57,30.57 14.38,30.57
  Bottom 0.203: C11.1 R26.1 21.2,37.96 v19.75,37.96
N$29
  Bottom 0.203: C18.1 R27.2 | R27.2 | R27.2 24.06,70.32 6532.34
N$30
  Bottom 0.203: Q1.2 15.98,28.91 C20.1 15.73,30.69 R28.2
N$31
  Bottom 0.203: C19.1 R29.2 R30.2 27.81,28.91 Q1.1
N$32  (via drill 0.35)
  Top 0.203: v28.39,29.29 28.54,29.15 R29.1 | TIA.11 32.21,48.72 33.83,50.35 34.63,50.35 35.2,49.78 35.2,41.35 37.18,39.37 37.18,35.1 37.74,34.54 37.74,32.42 37.17,31.86 36.9,31.86 v36.62,31.58
  Bottom 0.203: R28.1 13.9,30.74 15,31.84 16.55,31.84 17.66,30.74 26.94,30.74 v28.39,29.29 | R29.1 32,28.68 T3.3 36.62,31.19 v36.62,31.58 | TIA.11 33.89,50.92 R31.2
  other vias: 31.53,29.15
N$33
  Bottom 0.203: R30.1 32.39,27.09 32.63,27.33 34.3,27.33 T3.1
N$34
  Bottom 0.203: T4.3 49.56,43.34 R17.1
N$35  (via drill 0.35)
  Top 0.203: IC1.8 47.67,60.03 IC1.5
  Bottom 0.203: IC1.13 IC1.12 46.58,62.57 49.12,60.03 IC1.5
  other vias: 45.13,57.49 51.28,60.03
N$36
  Bottom 0.203: IC1.2 51.91,64.47 52.42,64.47 53.83,65.88 D3.A
N$37
  Bottom 0.356: U1.14 67.04,64.36 67.12,64.28 67.12,63.82 67.53,63.42 R39.2 68.19,61.38 R38.1
N$38
  Bottom 0.203: IC1.4 IC1.3
N$39  (via drill 0.35)
  Top 0.203: v42.51,66.72 45.81,63.42 v45.81,60.03
  Bottom 0.203: IC1.10 v45.81,60.03 46.7,60.03 47.98,58.76 IC1.6 | D1.A v42.51,66.72
N$40  (via drill 0.35)
  Top 0.203: v46.7,58.09 56.62,58.09 D2.C
  Bottom 0.203: v46.7,58.09 46.31,58.09 46.27,58.12 45.77,58.12 IC1.9 44.22,58.76 43.81,59.16 43.81,60.09 D1.C 41.84,62.32 43.99,64.47 50.64,64.47 IC1.1 51.29,69.01 51.05,69.25 51.05,71.37 51.29,71.62 R33.1
  other vias: 57.04,58.51
N$41  (1 unrouted)
N$42  (via drill 0.35)
  Top 0.356: R36.2 76.66,25.21 ON.A
  other vias: 76.65,25.2
N$43  (1 unrouted)
  Bottom 0.279: U2.P$2 65.76,74.41 R43.1
N$44  (1 unrouted)
N$45  (1 unrouted)
N$46  (via drill 0.35)
  Top 0.203: v72.17,77.51 70.8,78.88 R46.2
  Bottom 0.203: U2.P$13 71.54,74.97 72.05,74.97 72.56,75.48 72.56,76.35 72.17,76.74 v72.17,77.51
  other vias: 70.8,79.17
N$47  (1 unrouted)
N$48  (via drill 0.35)
  Bottom 0.356: DONE.C R45.2
  other vias: 74.6,25.38
N$49  (via drill 0.35)
  Bottom 0.356: R44.2 74.55,31.25 CHRG/LBO.C
  other vias: 74.55,31.03
N$50
  Bottom 0.203: R47.2 71.49,77.83 71.49,76.85 72.16,76.18 72.16,75.65 71.98,75.47 71.54,75.47 U2.P$12
P_SW  (via drill 0.35)  (3 unrouted)
  Top 0.203: v51.05,53.47 51.05,47.27 v51.18,47.15
  Bottom 0.203: D3.C 56.09,64.42 55.72,64.42 52.94,61.64 52.94,57.37 52.42,56.85 51.77,56.85 51.05,56.13 v51.05,53.47 | T4.1 51.39,42.63 51.15,42.87 51.15,47.15 v51.17,47.15 v51.18,47.15
PHI_0  (via drill 0.35)
  Top 0.203: v45.53,56.36 45.53,52.67 TIA.4
  Bottom 0.203: 6507.27 42.13,56.7 44.79,56.7 45.13,56.36 v45.53,56.36
PHI_2
  Top 0.203: 6507.28 36.91,64.46 36.91,65.3 36.51,65.7 36.13,65.7 34.73,67.1 27.8,67.1 25.04,69.86 25.04,71.37 24.47,71.94 13,71.94 6532.39
  Bottom 0.203: TIA.26 23.16,35.11 24.55,35.11 30.12,40.68 30.12,46.31 30.34,46.54 30.34,49.4 34.39,53.45 34.63,53.45 35.81,54.62 35.81,56.13 37.94,58.27 37.94,61.34 38.7,62.1 39.27,62.1 39.67,61.7 39.67,61.19 40.28,60.58 40.28,59.7 40.46,59.52 6507.28
R/W
  Top 0.203: 6532.35 26.27,65.58 26.27,65.54 30.67,61.14 35.15,61.14 6507.26 36.77,57.1 37.74,56.13 37.74,45.32 37.94,45.12 37.94,43.05 38.91,42.09 38.91,35.1 38.15,34.34 38.15,32.14 36.91,30.9 36.34,30.9 35.76,31.48 32,31.48 31.62,31.86 21.13,31.86 20.25,32.75 19.3,32.75 18.99,33.05 TIA.25
RAW_CVID  (2 unrouted)
  Bottom 0.203: C2.2 R9.1 44.41,37.93 | R7.1 44.57,35.94 R6.1 R8.1
TIA_RDY  (via drill 0.35)
  Top 0.203: v55.26,57.36 54.6,56.7 54.15,56.7 52.98,55.52 52.98,54.01 52.01,53.05 TIA.3
  Bottom 0.203: D2.A 54.67,60.55 R32.2 54.05,60.53 55.15,59.42 55.15,57.47 v55.26,57.36
VBAT  (via drill 0.35)  (2 unrouted)
  Top 0.406: 63.7,64.25 62.13,65.82 62.13,63.73 v63.38,62.48
  Bottom 0.203: T5.E 72.68,64.57 R37.1 70.78,67.34 C5.1
  Bottom 0.279: U2.P$20 68.52,70.96 68.51,70.95
  Bottom 0.356: C5.1 69.51,69.27 U1.8 67.69,70.01 66.89,70.81 | R41.2 66.89,70.81 | 68.51,70.95 67.03,70.95 66.89,70.81
VBUS  (via drill 0.35)  (3 unrouted)
  Top 0.279: U2.P$18 U2.P$3 v67.56,75.15 68.77,76.36 C22.1
  Top 0.356: CHRG/LBO.A 74.6,29.48 DONE.A
  Bottom 0.279: U2.P$3 v67.56,75.15 U2.P$4 | U2.P$19 U2.P$18 U2.P$17 | C22.1 70.02,78.03 U2.P$9
  Bottom 0.406: 69.83,80.35 C22.1
  other vias: 69.52,72.95 68.77,79.29
VLIPO  (1 unrouted)
  Bottom 0.279: U2.P$15 71.85,73.55 C21.1 | U2.P$14 U2.P$15 | U2.P$15 71.12,73.54 71.12,73.52 70.92,73.32 70.89,73.32 U2.P$16
(copper drawn outside any net)
  shapes: Bottom area x52, Top circle x1

## Text on the board
Top: QUARTER DOLLAR | UNITED STATES / OF AMERICA
tDocu: screen